# Altium PCB Y9A_4.PcbDoc
Units mil, origin at the board's own origin, x right, y up, seen from the top; angles counter-clockwise.
Board outline 6000 x 4000 mil, 2 copper layers (Top Layer, Bottom Layer); 11 components, 18 nets, 81 pads, 0 vias.
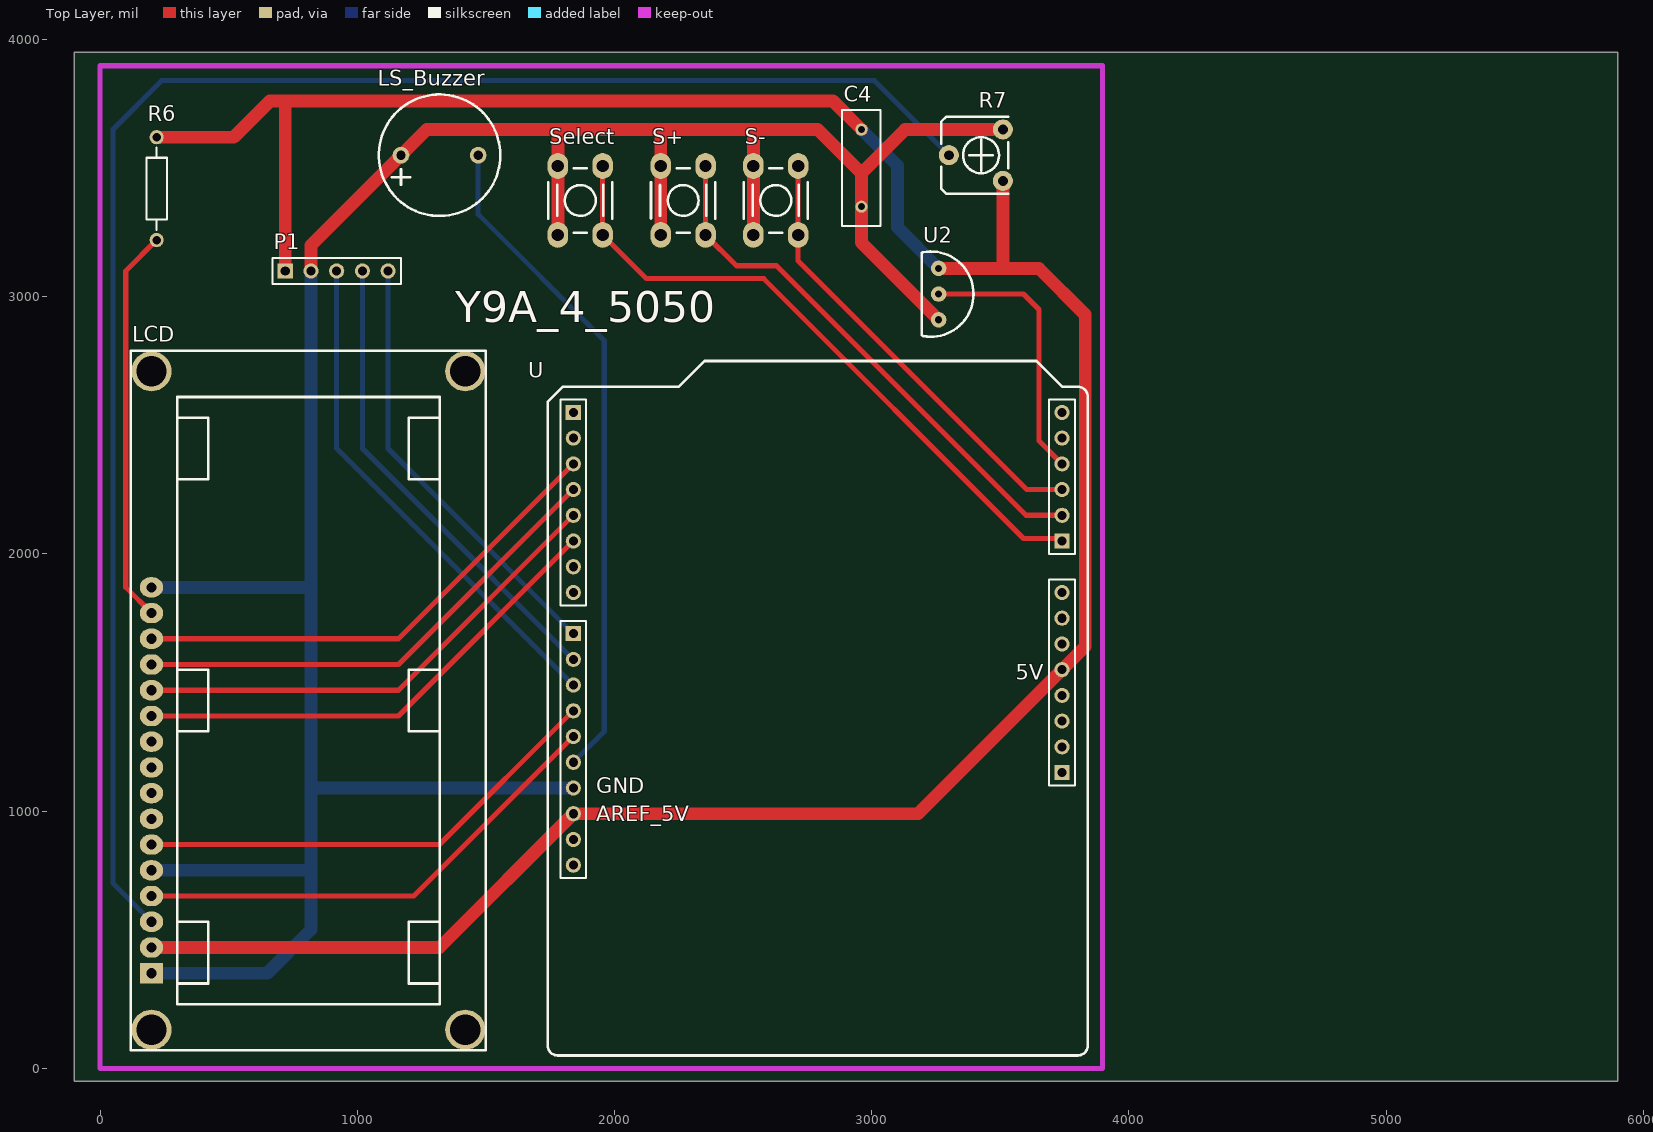
[diagram p0: Top Layer view]
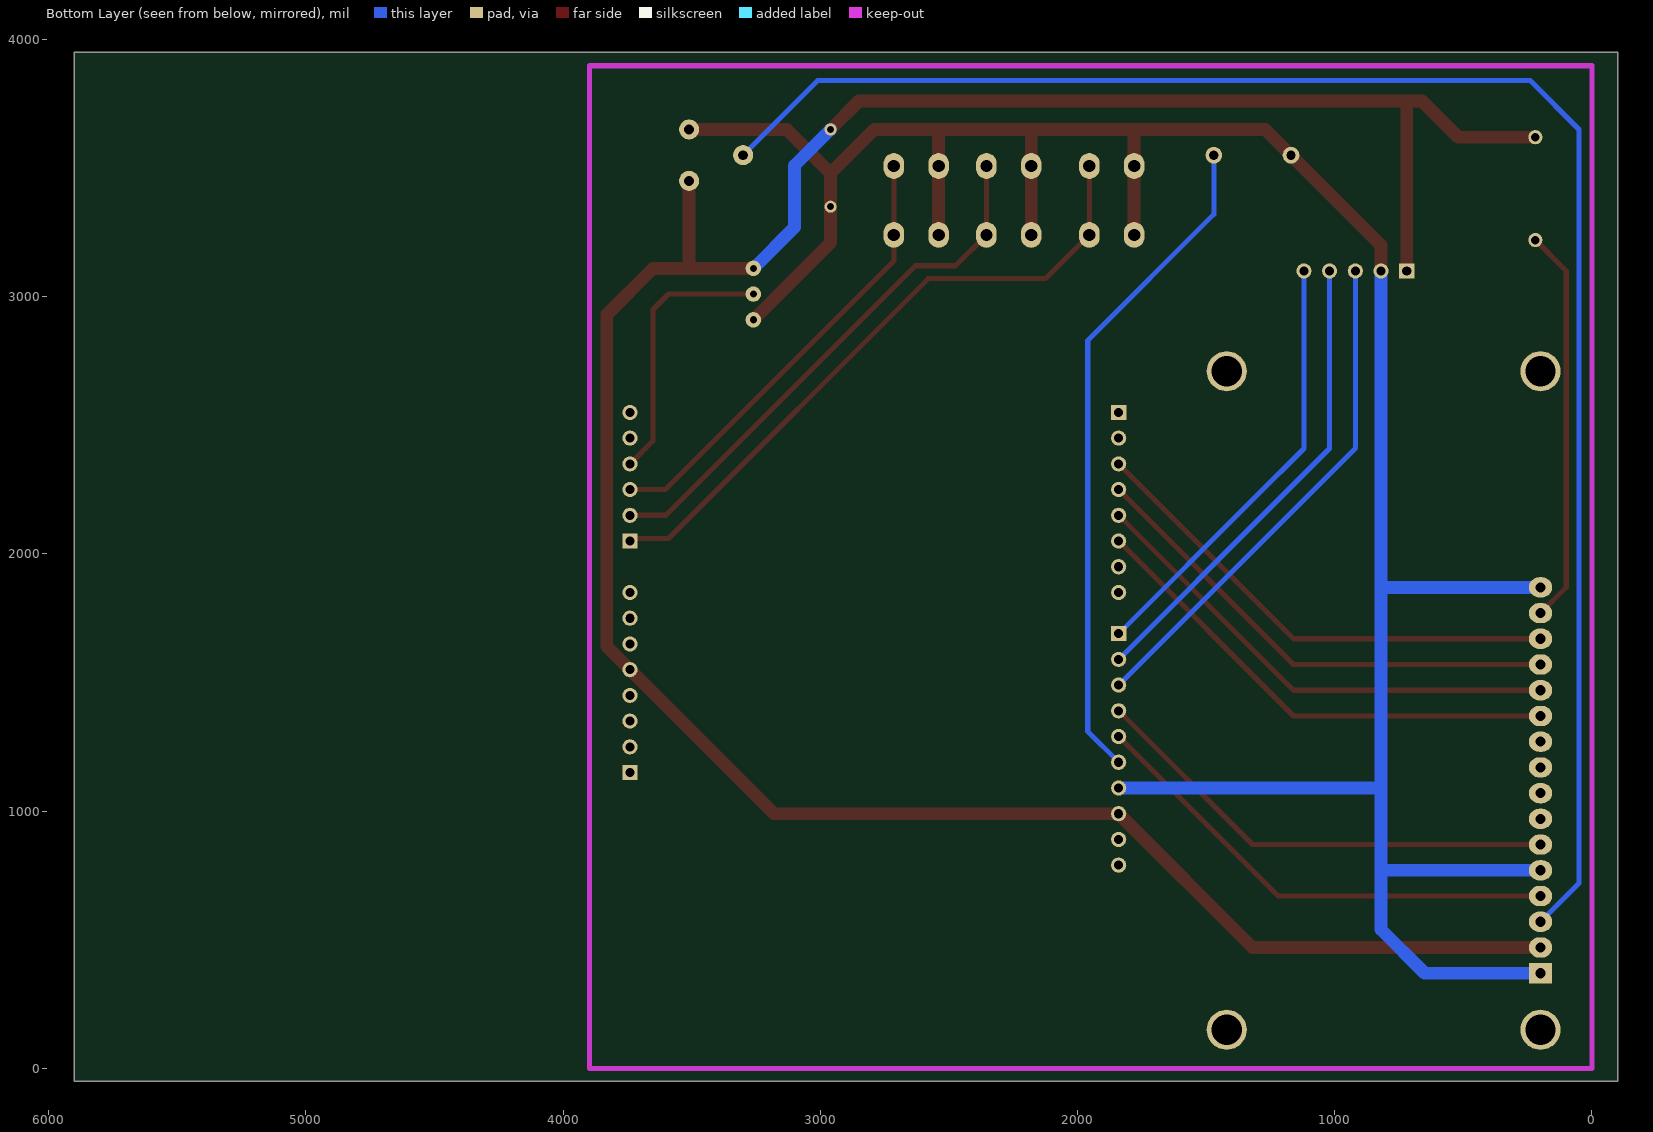
[diagram p1: Bottom Layer view, seen from below]

## Layer stack, top to bottom
Top Layer: signal copper 1.4
Dielectric: dielectric 12.6, FR-4, Dk 4.8
Bottom Layer: signal copper 1.4

## Board outline
-100,-50 5900,-50 5900,3950 -100,3950

## Design rules (kind name [scope] priority, off if disabled: settings)
Clearance [All] p1: gap=10
DiffPairsRouting [All] p1 off: maxlimit=10 minlimit=10 mostfreqgap=10 maxuncoupledlength=500
FanoutControl Fanout_BGA [IsBGA] p1 off: bgadir=Out bgaviamode=Centered fanoutstyle=Auto fanoutdirection=Alternating viagrid=1 // Fanout_BGA (Default Rule)
FanoutControl Fanout_LCC [IsLCC] p2 off: bgadir=Out bgaviamode=Centered fanoutstyle=Auto fanoutdirection=Alternating viagrid=1 // Fanout_LCC (Default Rule)
FanoutControl Fanout_SOIC [IsSOIC] p3 off: bgadir=Out bgaviamode=Centered fanoutstyle=Auto fanoutdirection=Alternating viagrid=1 // Fanout_SOIC (Default Rule)
FanoutControl Fanout_Small [(CompPinCount < 5)] p4 off: bgadir=Out bgaviamode=Centered fanoutstyle=Auto fanoutdirection=OutThenIn viagrid=1 // Fanout_Small (Default Rule)
FanoutControl Fanout_Default [All] p5 off: bgadir=Out bgaviamode=Centered fanoutstyle=Auto fanoutdirection=Alternating viagrid=1 // Fanout_Default (Default Rule)
HoleSize [All] p1 off: absolutevalues=TRUE maxlimit=100 minlimit=1 maxpercent=80.000 minpercent=20.000
HoleToHoleClearance [All] p1 off: gap=10 allowstackedmicrovias=TRUE
LayerPairs [All] p1 off: enforce=TRUE
MinimumSolderMaskSliver [All] p1 off: minsoldermaskwidth=10
NetAntennae [All] p1 off: netantennaetolerance=0
PolygonConnect [All] p1: connectstyle=Relief reliefconductorwidth=10 reliefentries=4 polygonreliefangle="90 Angle"
RoutingCorners [All] p1 off: cornerstyle=45-Degree minsetback=100 maxsetback=100
RoutingLayers [All] p1 off: top layer_v5=TRUE bottom layer_v5=TRUE
RoutingPriority [All] p1 off: routingpriority=0
RoutingTopology [All] p1 off: topology=Shortest
RoutingVias [All] p1: holewidth=28 width=50 viastyle="Through Hole" minholewidth=28 minwidth=50 maxholewidth=28 maxwidth=50
ShortCircuit [All] p1 off: allowed=FALSE
SilkToSilkClearance [All] p1 off: silktosilkclearance=10
SilkscreenOverComponentPads [All] p1 off: minsilkscreentomaskgap=10
SolderMaskExpansion [All] p1: expansion=4
TestPointUsage [All] p1 off: valid=0 allowmultiple=FALSE
Testpoint [All] p1 off: side=15 testpointundercomponent=TRUE minsize=40 maxsize=100 preferedsize=60 minholesize=0 maxholesize=40 preferedholesize=32 testpointgrid=1 style=1023 order=0-112345678
UnRoutedNet [All] p1 off:
Width Width_2 [InNet('5V')] p1: maxlimit=50 minlimit=10 preferedwidth=50
Width Width_1 [InNet('GND')] p2: maxlimit=50 minlimit=10 preferedwidth=50
Width [All] p3: maxlimit=50 minlimit=10 preferedwidth=20 toplayer_maxwidth=20 bottomlayer_maxwidth=20 minimp=50.000000 maximp=50.000000 favimp=50.000000
5 further rules are at their usual default settings.

## Components (designator, comment, footprint, x,y, rotation, side; value= is the part's Value field where it differs from the comment)
C4 "Cap" RAD-0.3 2960,3500 r90 top
LCD "LCD1602" LCD1602 200,370 r90 top
LS_Buzzer "Buzzer" Buzzer 1170,3550 r0 top (schematic designator LS)
P1 "Header 5" HDR1X5 720,3100 r0 top
R6 "Res2" AXIAL-0.4 220,3420 r90 top
R7 "RPot" RP-W 3510,3450 r90 top
S+ "SW-PB" AN-S 2180,3240 r90 top
S- "SW-PB" AN-S 2540,3240 r90 top
Select "SW-PB" AN-S 1780,3240 r90 top
U "Arduino" Arduino-UNO-EX 2790,1690 r90 top
U2 "LM35" LM35 3260,3110 r0 top

## Footprints (in the part's own frame and the unit in brackets; to place one, negate y for a bottom-side part, rotate by r counter-clockwise, add the part's x,y. Pads: shape width x height; smd on the part's side, far side on the other; paste and mask are expansions set on the pad)
AN-S [mil] "小按钮开关"
  oval 100x80 hole 48: 1(0,0) 1(268,0) 2(0,-174) 2(268,-174)
  silkscreen extent 9,-212 259,38
Arduino-UNO-EX [mm]
  rect 1.5x1.5 hole 0.9: 1(21.844,24.13) 9(0,24.13) 19(-13.716,-24.13) 27(9.144,-24.13)
  round 1.5 hole 0.9: 2(19.304,24.13) 3(16.764,24.13) 4(14.224,24.13) 5(11.684,24.13) 6(9.144,24.13) 7(6.604,24.13) 8(4.064,24.13) 10(-2.54,24.13) 11(-5.08,24.13) 12(-7.62,24.13) 13(-10.16,24.13) 14(-12.7,24.13) 15(-15.24,24.13) 16(-17.78,24.13) 17(-20.32,24.13) 18(-22.86,24.13) 20(-11.176,-24.13) 21(-8.636,-24.13) 22(-6.096,-24.13) 23(-3.556,-24.13) 24(-1.016,-24.13) 25(1.524,-24.13) 26(4.064,-24.13) 28(11.684,-24.13) 29(14.224,-24.13) 30(16.764,-24.13) 31(19.304,-24.13) 32(21.844,-24.13)
  silkscreen extent -41.66,-26.67 26.92,26.67
AXIAL-0.4 [mm] "Resistor; 2 Leads"
  round 1.4 hole 0.85: 1(-5.08,0) 2(5.08,0)
  silkscreen extent -4.06,-1.02 4.06,1.02
Buzzer [mil] "蜂鸣器"
  round 65 hole 36: 1(0,0) 2(300,0)
  silkscreen extent -86,-236 386,236
HDR1X5 [mm] "Connector; Header; 5 Position"
  rect 1.5x1.5 hole 0.9: 1(0,0)
  round 1.5 hole 0.9: 2(2.54,0) 3(5.08,0) 4(7.62,0) 5(10.16,0)
  silkscreen extent -1.27,-1.27 11.43,1.27
LCD1602 [mm] "1602液晶屏"
  round 3.962 hole 3: 0(-5.588,0) 0(-5.588,-30.988) 0(59.436,-30.988) 0(59.436,0)
  rect 2x2.3 hole 1: 1(0,0)
  oval 2x2.3 hole 1: 2(2.54,0) 3(5.08,0) 4(7.62,0) 5(10.16,0) 6(12.7,0) 7(15.24,0) 8(17.78,0) 9(20.32,0) 10(22.86,0) 11(25.4,0) 12(27.94,0) 13(30.48,0) 14(33.02,0) 15(35.56,0) 16(38.1,0)
  silkscreen extent -7.62,-33.02 61.47,2.03
LM35 [mil]
  round 60 hole 28: 1(0,0) 2(0,-100) 3(0,-200)
  silkscreen extent -65,-266 136,66
RAD-0.3 [mm] "Capacitor; 2 Leads"
  round 1.2 hole 0.7: 1(-3.81,0) 2(3.81,0)
  silkscreen extent -5.71,-1.91 5.71,1.91
RP-W [mil] "小电位器"
  round 78 hole 38: 1(0,0) 2(200,0) 3(100,210)
  silkscreen extent -50,-20 250,240

## Part data
C4: "Capacitor"
LS_Buzzer: "Magnetic Transducer Buzzer"
P1: "Header, 5-Pin"
R6: "Resistor"
R7: "Potentiometer"
S+ S- Select: "Switch"
U: library part Arduino-UNO-EX
U2: "LM35温度传感器"

## Nets (pads, with @x,y where several pads share a name; then routed paths per layer and width w, separated by ;. In a path a pad name is that pad's centre, name@x,y a point inside that pad or via, vN(x,y) a via of type N, cw(c..) or ccw(c..) an arc to the next point about the centre after c; other vN are vias at no path point)
5V: C4.2 LCD.2 P1.1 R6.2 R7.1 U2.1 U.16 U.23 | length 10567
  Top Layer w50: LCD.2 1320,470 U.16 3180,990 U.23 3830,1640 3830,2930 3650,3110 U2.1 U2.1@3270,3110 ; R6.2 520,3620 660,3760 2850,3760 C4.2 ; P1.1 720,3760 ; 3510,3110 R7.1
  Bottom Layer w50: C4.2 3100,3510 3100,3270 U2.1
GND: C4.1 LCD.1 LCD.5 LCD.16 LS_Buzzer.1 P1.2 R7.2 S+.1 S-.1 Select.1 U2.3 U.15 | length 10629.5
  Top Layer w50: P1.2 820,3200 LS_Buzzer.1 1270,3650 2790,3650 2960,3480 ; Select.1@1780,3240 1780,3508 1780,3650 ; S+.1@2180,3240 2180,3508 2180,3650 ; S-.1@2540,3240 2540,3508 2540,3650 ; U2.3 2960,3210 C4.1 2960,3480 ; R7.2 3130,3650 2960,3480
  Bottom Layer w50: LCD.16@211.08,1870 LCD.16 820,1870 ; 820,770 LCD.5 ; 820,1090 U.15 ; P1.2 820,540 650,370 LCD.1 ; LCD.1 211.08,370 188.92,370 LCD.1 ; LCD.5 188.92,770 LCD.5
NetLCD_3: LCD.3 R7.3 | length 6591
  Bottom Layer w20: LCD.3 50,720 50,3650 240,3840 3010,3840 R7.3
NetLCD_4: LCD.4 U.13 | length 1896.8
  Top Layer w20: LCD.4 1220,670 U.13
NetLCD_6: LCD.6 U.12 | length 1855.4
  Top Layer w20: LCD.6 1320,870 U.12
NetLCD_11: LCD.11 U.6 | length 1921.7
  Top Layer w20: LCD.11 1160,1370 U.6
NetLCD_12: LCD.12 U.5 | length 1921.7
  Top Layer w20: LCD.12 1160,1470 U.5
NetLCD_13: LCD.13 U.4 | length 1921.7
  Top Layer w20: LCD.13 1160,1570 U.4
NetLCD_14: LCD.14 U.3 | length 1921.7
  Top Layer w20: LCD.14 1160,1670 U.3
NetLCD_15: LCD.15 R6.1 | length 1541.1
  Top Layer w20: LCD.15 100,1870 100,3100 R6.1
NetLS_Buzzer_2: LS_Buzzer.2 U.14 | length 2612.7
  Bottom Layer w20: LS_Buzzer.2 1470,3320 1960,2830 1960,1310 U.14
NetP1_3: P1.3 U.11 | length 1991.1
  Bottom Layer w20: P1.3 920,2410 1150,2180 U.11
NetP1_4: P1.4 U.10 | length 1849.7
  Bottom Layer w20: P1.4 1020,2410 1230,2200 U.10
NetP1_5: P1.5 U.9 | length 1708.2
  Bottom Layer w20: P1.5 1120,2410 1310,2220 U.9
NetS+_2: S+.2 U.28 | length 2105.5
  Top Layer w20: S+.2@2354,3508 2354,3240 2474,3120 2630,3120 3600,2150 U.28
NetS-_2: S-.2 U.29 | length 1763.6
  Top Layer w20: S-.2@2714,3508 2714,3240 2714,3138.43 3602.43,2250 U.29
NetSelect_2: Select.2 U.27 | length 2546.9
  Top Layer w20: Select.2@1954,3508 1954,3240 2124,3070 2580,3070 3590,2060 3730,2060 U.27
NetU2_2: U2.2 U.30 | length 1052.1
  Top Layer w20: U2.2 3590,3010 3650,2950 3650,2440 U.30
pads on no net: LCD.0 LCD.7 LCD.8 LCD.9 LCD.10 U.1 U.2 U.7 U.8 U.17 U.18 U.19 U.20 U.21 U.22 U.24 U.25 U.26 U.31 U.32

## Keep-outs
Keep-Out Layer:
  lines w20: 0,0 0,3897.64 3897.64,3897.64 3897.64,0 0,0

## Silkscreen, mask and mechanical layers (free items; w line width, h text height)
Top Overlay:
  text "Y9A_4_5050" at 1380,2900 h120
  text "5V" at 3560,1510 h60
  text "GND" at 1930,1070 h60
  text "AREF_5V" at 1930,960 h60